# Allegro board METO_STM_CRY_V0_17.brd
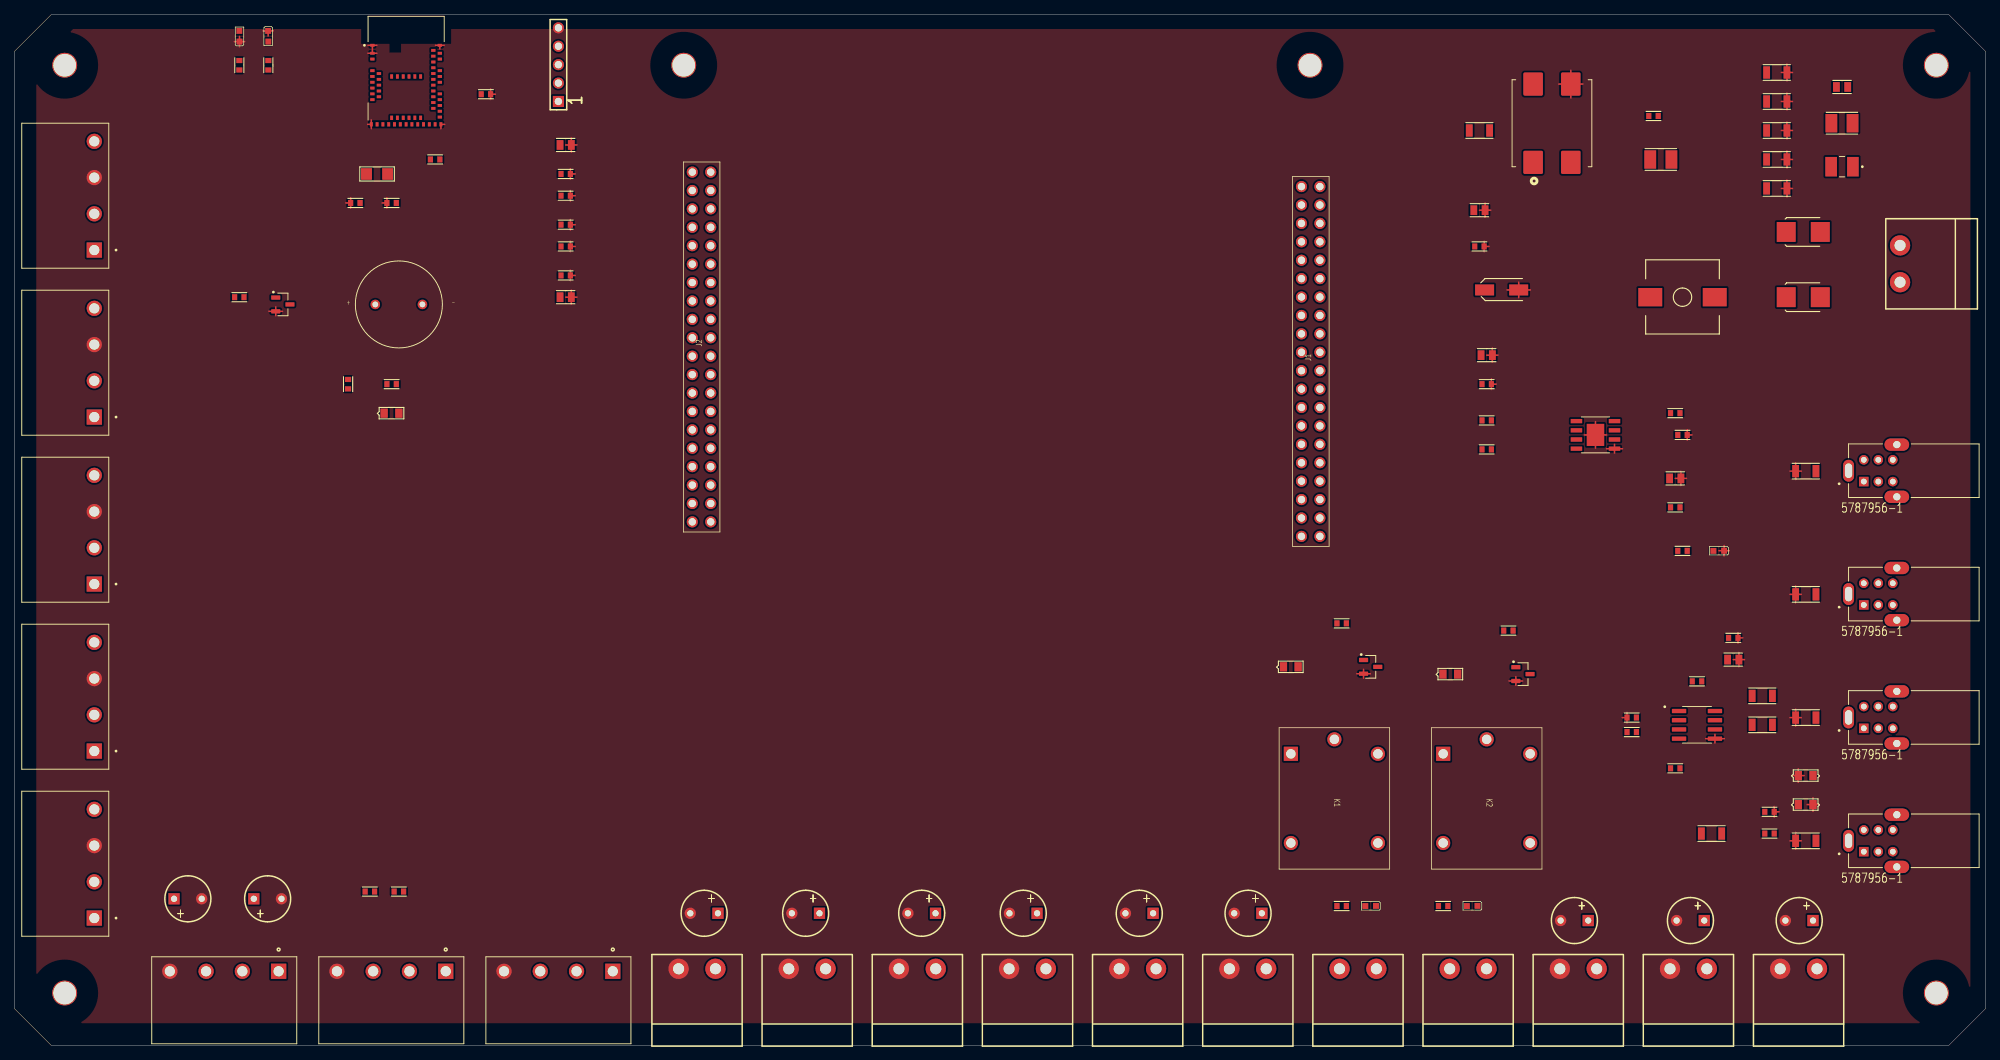
[diagram p0: board, top side]
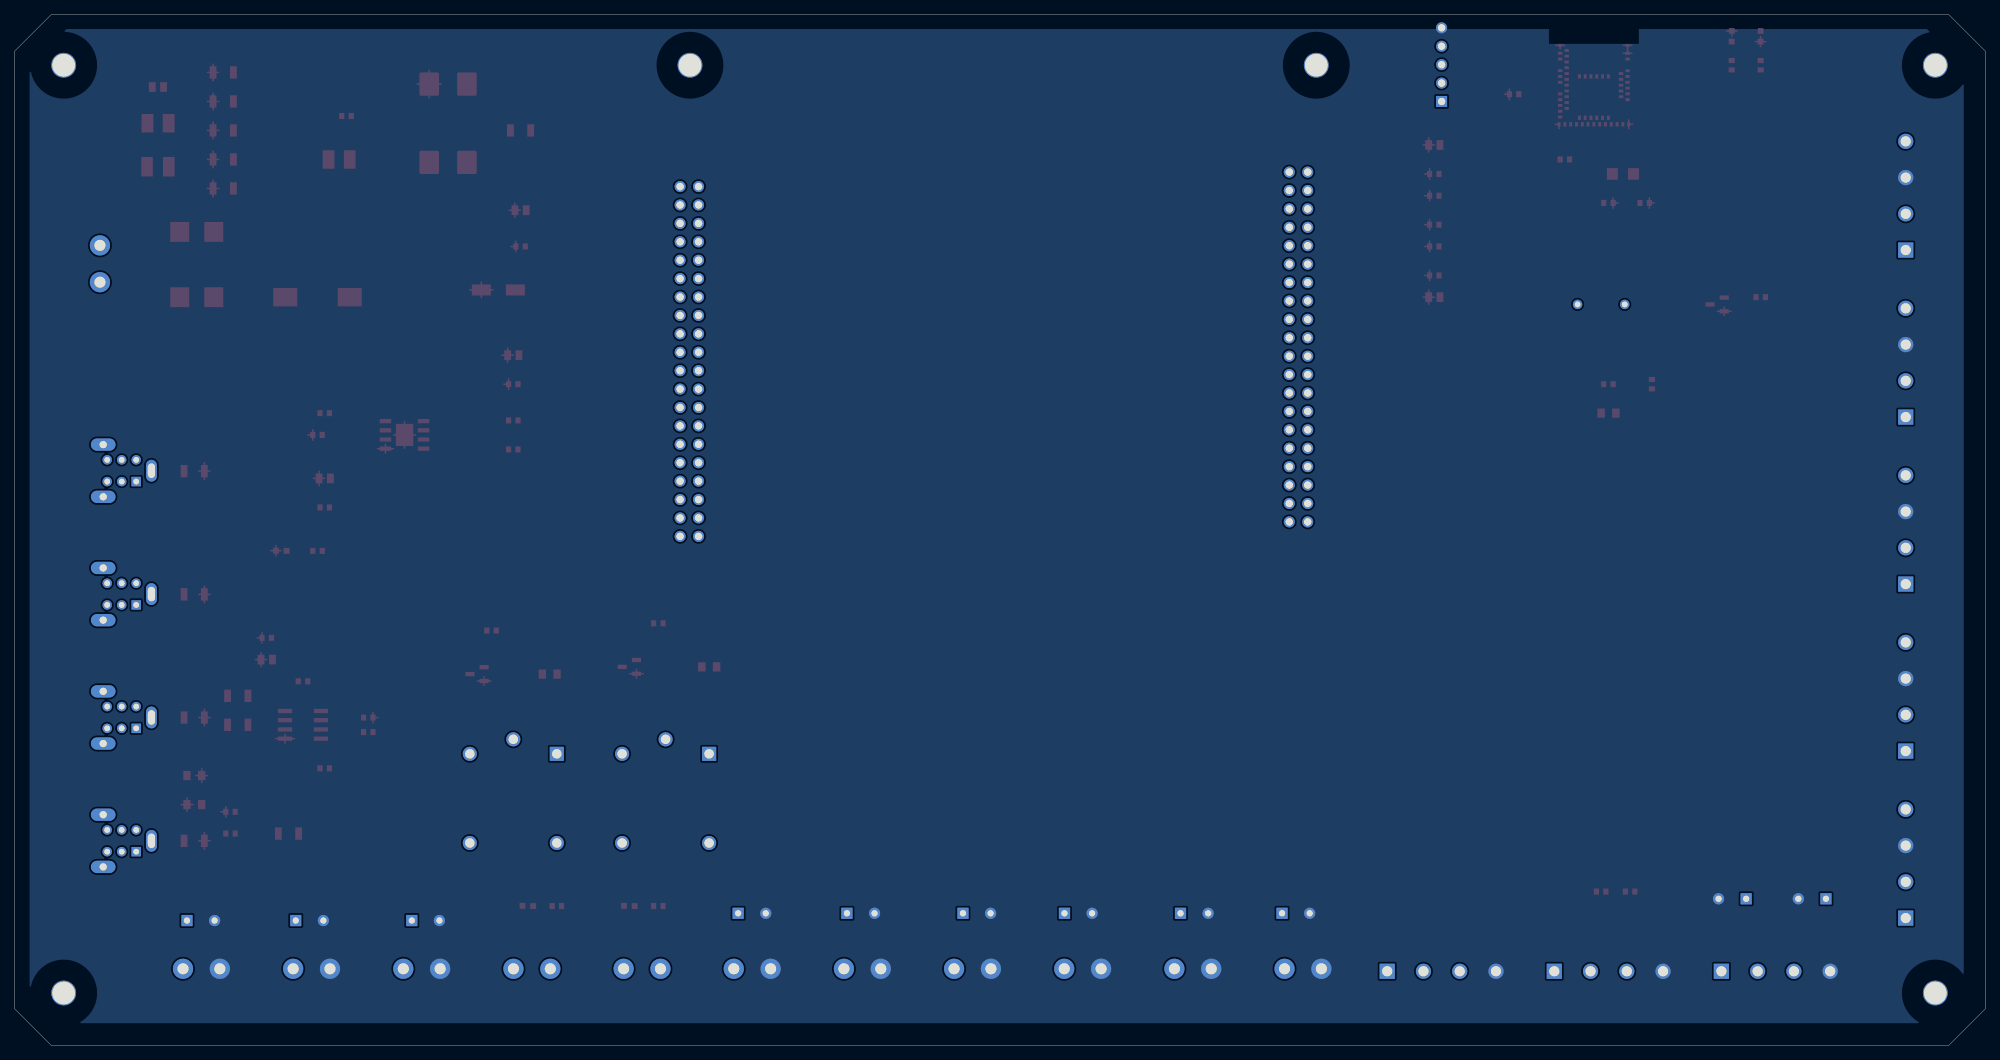
[diagram p1: board, bottom side, seen from below]

Outline 271.78 x 142.24 mm; copper layers: TOP, BOTTOM. Coordinates in mm from the lower left corner of the outline.
Outline path: 0,137.16 0,5.08 5.08,0 266.7,0 271.78,5.08 271.78,137.16 266.7,142.24 5.08,142.24 0,137.16

## Design rules (mm)
constraint set DEFAULT: min track width 0.203

## Placement (name value [footprint] x y rotation side)
C1  CAP POL  [CAPPOL2D250LS150034]  172 18.24 180 top
C2  CAP POL  [CAPPOL2D250LS150034]  217 17.24 180 top
C3  CAP POL  [CAPPOL2D250LS150034]  157 18.24 180 top
C4  CAP POL  [CAPPOL2D250LS150034]  141 18.24 180 top
C5  CAP POL  [CAPPOL2D250LS150034]  127 18.24 180 top
C6  CAP POL  [CAPPOL2D250LS150034]  111 18.24 180 top
C7  CAP POL  [CAPPOL2D250LS150034]  22 20.24 0 top
C8  CAP POL  [CAPPOL2D250LS150034]  97 18.24 180 top
C9  CAP POL  [CAPPOL2D250LS150034]  33 20.24 0 top
C10  CAP POL  [CAPPOL2D250LS150034]  233 17.24 180 top
C11  CAP POL  [CAPPOL2D250LS150034]  248 17.24 180 top
C12  10u/6V3/CER  [SMC0805]  237 53.24 0 top
C13  100n  [SMC0603]  237 56.24 0 top
C14  10u/6V3/CER  [SMC0805]  76 124.24 0 top
C15  100n  [SMC0603]  76 120.24 0 top
C16  100n  [SMC0603]  76 117.24 0 top
C17  100n  [SMC0603]  76 113.24 0 top
C18  100n  [SMC0603]  76 110.24 0 top
C19  100n  [SMC0603]  76 106.24 0 top
C20  10u/6V3/CER  [SMC0805]  76 103.24 0 top
C21  100n  [SMC0603]  65 131.24 0 top
C22  18p  [SMC0603]  47 116.24 0 top
C23  18p  [SMC0603]  52 116.24 0 top
C24  100n  [SMC0603]  202 110.24 0 top
C25  22uF/25V/LowESL  [SMC1210]  227 122.24 0 top
C26  100n  [SMC0603]  226 128.24 0 top
C27  10u/6V3/CER  [SMC0805]  202 115.24 0 top
C28  10u/6V3/CER  [SMC0805]  203 95.24 0 top
C29  100n  [SMC0603]  203 91.24 0 top
C30  10u/6V3/CER  [SMC0805]  229 78.24 0 top
C31  22uF/25VDV/Tantal  [CAP_6TPB33M]  252 121.24 180 top
C32  22uF/25V/LowESL  [SMC1210]  252 127.24 180 top
C33  10u/25V/CER  [SMC0805]  252 132.24 180 top
D1  1N4148WX  [SMDSOD323SD05T]  177 52.24 0 top
D2  1N4148WX  [SMDSOD323SD05T]  199 51.24 0 top
D3  SD12C  [SMDSOD323PESD5V]  248 33.24 0 top
D4  SD12C  [SMDSOD323PESD5V]  248 37.24 0 top
D5  1N4148WX  [SMDSOD323SD05T]  53 87.24 0 top
D6  LED-BLUE  [LED_0603]  35 139.24 90 top
D7  LED-RED  [LED_0603]  31 139.24 270 top
D8  MBRA340T3  [SMDO214AA21]  249 112.24 0 top
D9  MBRA340T3  [SMDO214AA21]  249 103.24 0 top
D10  SMAJ7A  [SMDO214AA21SMAJ33A]  205 104.24 0 top
D11  LED-GREEN  [LED_0603]  235 68.24 0 top
D12  LED-BLUE  [LED_0603]  187 19.24 0 top
D13  LED-BLUE  [LED_0603]  201 19.24 0 top
FB1  MPZ1608S601A  [SMR0603]  229 74.24 0 top
FL1  ACM1211-102-2PL-TL01  [FIL_ACM1211-102-2PL-TL01]  212 127.24 90 top
J1  FH_2x20SG  [FH2X20SG]  180 70.24 90 top
J2  FH_2x20SG  [FH2X20SG]  96 72.24 90 top
J3  CON2  [2LI_KLEMENS_200MILS]  155.46 10.58 180 top
J4  CON2  [2LI_KLEMENS_200MILS]  170.64 10.58 180 top
J5  282811-4  [TE_282811-4]  11 117.24 90 top
J6  CON2  [2LI_KLEMENS_200MILS]  185.83 10.58 180 top
J7  CON2  [2LI_KLEMENS_200MILS]  201.02 10.58 180 top
J8  282811-4  [TE_282811-4]  11 94.2 90 top
J9  CON2  [2LI_KLEMENS_200MILS]  140.27 10.58 180 top
J10  282811-4  [TE_282811-4]  11 71.16 90 top
J11  282811-4  [TE_282811-4]  51.96 10.24 180 top
J12  CON2  [2LI_KLEMENS_200MILS]  125.08 10.58 180 top
J13  282811-4  [TE_282811-4]  11 48.12 90 top
J14  282811-4  [TE_282811-4]  75 10.24 180 top
J15  CON2  [2LI_KLEMENS_200MILS]  109.89 10.58 180 top
J16  282811-4  [TE_282811-4]  11 25.08 90 top
J17  CON2  [2LI_KLEMENS_200MILS]  94.7 10.58 180 top
J18  CON2  [2LI_KLEMENS_200MILS]  79.51 10.58 180 top
J19  CON2  [2LI_KLEMENS_200MILS]  260 93.24 270 top
J20  282811-4  [TE_282811-4]  28.92 10.24 180 top
J21  CON2  [2LI_KLEMENS_200MILS]  216.21 10.58 180 top
J22  CON2  [2LI_KLEMENS_200MILS]  231.4 10.58 180 top
J23  5787956-1  [TE_5787956-1]  257 79.3 0 top
J24  CON5  [CON5X140PROG]  75 130.24 90 top
J25  5787956-1  [TE_5787956-1]  257 62.28 0 top
J26  5787956-1  [TE_5787956-1]  257 45.26 0 top
J27  5787956-1  [TE_5787956-1]  257 28.24 0 top
K1  JQC-3F-_T73_-1Z-12VDC  [JQC3FT731Z12VDC]  176 40.24 270 top
K2  JQC-3F-_T73_-1Z-12VDC  [JQC3FT731Z12VDC]  197 40.24 270 top
L1  10uH  [SML0603]  58 122.24 0 top
L2  10u/SLF10145  [SLF10145NEW]  230 103.24 0 top
LS1  CCG-1206  [CUI_CCG-1206]  53 102.24 0 top
NOREF  -  [unnamed]  92.28 135.24 0 top
NOREF#2  -  [#2]  197 40.24 0 top
NOREF#3  -  [#2]  176 40.24 90 top
NOREF#4  -  [#2]  197 27.94 0 top
NOREF#5  -  [#2]  197 40.24 90 top
NOREF#6  -  [unnamed]  265 7.24 0 top
NOREF#7  -  [unnamed]  178.64 135.24 0 top
NOREF#8  -  [#2]  209 27.94 90 top
NOREF#9  -  [unnamed]  265 135.24 0 top
NOREF#10  -  [#2]  188 27.94 90 top
NOREF#11  -  [unnamed]  6.92 7.24 0 top
NOREF#12  -  [#2]  188 40.24 90 top
NOREF#13  -  [#2]  176 27.94 0 top
NOREF#14  -  [unnamed]  6.92 135.24 0 top
NOREF#15  -  [#2]  176 40.24 0 top
NOREF#16  -  [#2]  209 40.24 90 top
Q1  BC817  [SOT95P230X110-3N]  187 52.24 0 top
Q2  BC817  [SOT95P230X110-3N]  208 51.24 0 top
Q3  BC817  [SOT95P230X110-3N]  37 102.24 0 top
R1  1K  [SMR0603]  183 58.24 0 top
R2  1K  [SMR0603]  206 57.24 0 top
R3  10k  [SMR0603]  242 29.24 0 top
R4  10k  [SMR0603]  229 38.24 0 top
R5  10k  [SMR0603]  223 43.24 0 top
R6  10k  [SMR0603]  232 50.24 180 top
R7  10k  [SMR0603]  223 45.24 0 top
R8  100R  [SMR1206]  241 44.24 180 top
R9  120R  [SMR1206]  234 29.24 0 top
R10  100R  [SMR1206]  241 48.24 180 top
R11  100R  [SMR1206]  247 79.24 0 top
R12  10k  [SMR0603]  242 32.24 0 top
R13  33R  [SMR0603]  46 91.24 270 top
R14  1K  [SMR0603]  52 91.24 180 top
R15  180R  [SMR0603]  31 103.24 0 top
R16  470R  [SMR0603]  35 135.24 90 top
R17  470R  [SMR0603]  31 135.24 90 top
R18  OR  [SMR1206]  202 126.24 0 top
R19  0R  [SMR1206]  243 134.24 0 top
R20  0R  [SMR1206]  243 130.24 0 top
R21  0R  [SMR1206]  243 126.24 0 top
R22  0R  [SMR1206]  243 122.24 0 top
R23  0R  [SMR1206]  243 118.24 0 top
R24  100k  [SMR0603]  203 86.24 0 top
R25  6k8  [SMR0603]  229 87.24 0 top
R26  100k  [SMR0603]  203 82.24 0 top
R27  470R  [SMR0603]  230 68.24 0 top
R28  2k2  [SMR0603]  230 84.24 0 top
R29  100R  [SMR1206]  247 62.24 0 top
R30  100R  [SMR1206]  247 45.24 0 top
R31  100R  [SMR1206]  247 28.24 0 top
R32  470R  [SMR0603]  183 19.24 0 top
R33  470R  [SMR0603]  197 19.24 0 top
R34  1K5  [SMR0603]  49 21.24 0 top
R35  1K5  [SMR0603]  53 21.24 0 top
U1  MAX485ESA+  [SOIC127P600X175-8N]  232 44.24 0 top
U2  MDBT50Q-1MV2  [XCVR_MDBT50Q-1MV2]  54 134.24 0 top
U3  AP7165-SPG-13  [SOIC127P600X163-9N]  218 84.24 0 top
Y1  CM315D32768DZFT  [XTAL_CM315_SMD]  50 120.24 180 top

## Library data of the parts
C1-C11 = CAP POL
C12-C23 C28-C30 = CAPACITOR NON-POL
C24-C27 = CAPACITOR NON-POL: room: Vdd5V
C31 = 6TPB33M: room: PowerIn
C32 C33 = CAPACITOR NON-POL: room: PowerIn
D1 D2 D5 = DIODE ZENER: room: Buzzer
D3 D4 = DIODE TVS BI-DIR: room: rs232
D6 D7 D11-D13 = LED
D8 = 1N5819M/CYL
D9 = 1N5819M/CYL: room: Vdd5V
D10 = DIODE TVS: room: Vdd5V
FB1 = INDUCTOR/SM
FL1 = ACM1211-102-2PL-TL01: room: Vdd5V
J1 J2 = FH_2x20SG
J3 J4 J6 J7 J9 J12 J15 J17-J19 J21 J22 = CON2
J5 J8 J10 J11 J13 J14 J16 J20 = 282811-4
J23 J25-J27 = 5787956-1
J24 = CON5
K1 K2 = JQC-3F-_T73_2
L1 = INDUCTOR
L2 = INDUCTOR/SM: room: Vdd5V
LS1 = CCG-1206: room: Buzzer
Q1-Q3 = BC817: room: Buzzer
R1 R2 R11 R13-R15 R29-R31 = RESISTOR/SM_0: room: Buzzer
R3-R10 R12 R25 R28 = RESISTOR/SM_0
R16 R17 R24 R26 R27 R32-R35 = RESISTOR
R18 = RESISTOR/SM_0: room: Vdd5V
R19-R23 = RESISTOR: room: GndMatch
U1 = MAX485ESA+
U2 = MDBT50Q-1MV2_0
U3 = AP7165-SPG-13_0
Y1 = CRYSTAL/SM

## Footprints (pads in the part's own frame, mm; a bottom-side part is the same pattern mirrored in y, then rotated)
2LI_KLEMENS_200MILS
  round 2.794 hole 1.524: 1(-17.145,0) 2(-12.065,0)
CAP_6TPB33M
  rect 1.6x2.7 smd: 1(-1.5,0) 2(1.5,0)
CAPPOL2D250LS150034
  rect 1.549x1.549 hole 0.864: 1(0,0)
  round 1.549 hole 0.864: 2(3.81,0)
CON5X140PROG
  rect 1.524x1.524 hole 1.016: 1(0,0)
  round 1.524 hole 1.016: 2(2.54,0) 3(5.08,0) 4(7.62,0) 5(10.16,0)
CUI_CCG-1206
  round 1.308 hole 0.8: M(3.25,0) P(-3.25,0)
FH2X20SG
  round 1.53 hole 1.02: 1(0,0) 2(0,2.54) 3(2.54,0) 4(2.54,2.54) 5(5.08,0) 6(5.08,2.54) 7(7.62,0) 8(7.62,2.54) 9(10.16,0) 10(10.16,2.54) 11(12.7,0) 12(12.7,2.54) 13(15.24,0) 14(15.24,2.54) 15(17.78,0) 16(17.78,2.54) 17(20.32,0) 18(20.32,2.54) 19(22.86,0) 20(22.86,2.54) 21(25.4,0) 22(25.4,2.54) 23(27.94,0) 24(27.94,2.54) 25(30.48,0) 26(30.48,2.54) 27(33.02,0) 28(33.02,2.54) 29(35.56,0) 30(35.56,2.54) 31(38.1,0) 32(38.1,2.54) 33(40.64,0) 34(40.64,2.54) 35(43.18,0) 36(43.18,2.54) 37(45.72,0) 38(45.72,2.54) 39(48.26,0) 40(48.26,2.54)
FIL_ACM1211-102-2PL-TL01
  custom 3.2x2.7 smd: 1(-5.4,2.6) 2(-5.4,-2.6) 3(5.4,-2.6) 4(5.4,2.6)
JQC3FT731Z12VDC
  rect 1.95x1.95 hole 1.3: 1(0,0)
  round 1.95 hole 1.3: 2(12.3,0) 3(12.3,12) 4(0,12) 5(-2,6)
LED_0603
  rect 0.813x0.813 smd: 1(-0.737,0) 2(0.737,0.025)
SLF10145NEW
  rect 3.302x2.54 smd: 1(-4.445,0) 2(4.445,0)
SMC0603
  rect 0.711x0.838 smd: 1(-0.65,0) 2(0.65,0)
SMC0805
  rect 0.94x1.346 smd: 1(-0.78,0) 2(0.78,0)
SMC1210
  rect 1.626x2.54 smd: 1(-1.448,0) 2(1.473,0)
SMDO214AA21
  rect 2.616x2.743 smd: 1(0,0) 2(-4.699,0)
SMDO214AA21SMAJ33A
  rect 2.616x1.524 smd: 1(2.413,0) 2(-2.286,0)
SMDSOD323PESD5V
  rect 1.016x1.27 smd: 1(0,0) 2(-2.032,0)
SMDSOD323SD05T
  rect 1.016x1.27 smd: 1(0,0) 2(-2.032,0)
SML0603
  rect 0.711x0.838 smd: 1(-0.65,0) 2(0.65,0)
SMR0603
  rect 0.711x0.838 smd: 1(-0.65,0) 2(0.65,0)
SMR1206
  rect 0.94x1.702 smd: 1(-1.4,0) 2(1.4,0)
SOIC127P600X163-9N
  rect 1.58x0.59 smd: 1(-2.625,1.905) 2(-2.625,0.635) 3(-2.625,-0.635) 4(-2.625,-1.905) 5(2.625,-1.905) 6(2.625,-0.635) 7(2.625,0.635) 8(2.625,1.905)
  rect 2.41x3.05 smd: 9(0,0)
SOIC127P600X175-8N
  custom 1.97x0.59 smd: 1(-2.475,1.905) 2(-2.475,0.635) 3(-2.475,-0.635) 4(-2.475,-1.905) 5(2.475,-1.905) 6(2.475,-0.635) 7(2.475,0.635) 8(2.475,1.905)
SOT95P230X110-3N
  custom 1.26x0.59 smd: 1(-0.98,0.95) 2(-0.98,-0.95) 3(0.98,0)
TE_282811-4
  rect 2.1x2.1 hole 1.4: 1(-7.5,0)
  round 2.1 hole 1.4: 2(-2.5,0) 3(2.5,0) 4(7.5,0)
TE_5787956-1
  rect 1.308x1.308 hole 0.8: 1(-2,-1.5)
  round 1.308 hole 0.8: 2(-2,1.5) 3(0,-1.5) 4(0,1.5) 5(2,-1.5) 6(2,1.5)
  oval 1.508x3.016 hole 1x2: S1(-4.1,0)
  oval 3.4x1.7 hole 1: S2(2.55,3.6) S3(2.55,-3.6)
unnamed
  round 3.429 hole 3.124: (0,0)
XCVR_MDBT50Q-1MV2
  rect 0.6x0.4 smd: 1(-4.65,3.75) 2(-4.65,2.65) 3(-4.65,1.85) 4(-4.65,0.25) 5(-3.75,-0.15) 6(-4.65,-0.55) 7(-3.75,-0.95) 8(-4.65,-1.35) 9(-3.75,-1.75) 10(-4.65,-2.15) 11(-3.75,-2.55) 12(-4.65,-2.95) 13(-3.75,-3.35) 14(-4.65,-3.75) 34(4.65,-6.15) 35(4.65,-5.35) 36(3.75,-4.95) 37(4.65,-4.55) 38(3.75,-4.15) 39(4.65,-3.75) 40(3.75,-3.35) 41(4.65,-2.95) 42(3.75,-2.55) 43(3.75,-1.75) 44(4.65,-1.35) 45(3.75,-0.95) 46(4.65,-0.55) 47(3.75,-0.15) 48(4.65,0.25) 49(3.75,0.65) 50(3.75,1.45) 51(4.65,1.85) 52(3.75,2.25) 53(4.65,2.65) 54(3.75,3.05) 55(4.65,3.75)
  rect 0.4x0.6 smd: 15(-4.8,-7.15) 16(-4,-7.15) 17(-3.2,-7.15) 18(-2.4,-7.15) 19(-2,-6.25) 20(-1.6,-7.15) 21(-1.2,-6.25) 22(-0.8,-7.15) 23(-0.4,-6.25) 24(0,-7.15) 25(0.4,-6.25) 26(0.8,-7.15) 27(1.2,-6.25) 28(1.6,-7.15) 29(2,-6.25) 30(2.4,-7.15) 31(3.2,-7.15) 32(4,-7.15) 33(4.8,-7.15) 56(-2,-0.55) 57(-1.2,-0.55) 58(-0.4,-0.55) 59(0.4,-0.55) 60(1.2,-0.55) 61(2,-0.55)
XTAL_CM315_SMD
  rect 1.499x1.6 smd: 1(-1.453,0) 2(1.463,0)

## Nets
3.3V: C14.1 C15.1 C16.1 C17.1 C18.1 C19.1 C20.1 FB1.2 J11.1 J24.1 L1.2 R27.1 R34.1 R35.1 U2.28 U2.30(VDDH) U2.32
GND: C1.2 C2.2 C3.2 C4.2 C5.2 C6.2 C7.2 C8.2 C9.2 C10.2 C11.2 C12.2 C13.2 C14.2 C15.2 C16.2 C17.2 C18.2 C19.2 C20.2 C21.2 C22.1 C23.1 C24.2 C27.2 C28.2 C29.2 C30.2 D3.1 D4.2 D6.2(CATHODE) D7.2(CATHODE) D10.1 D11.2(CATHODE) FL1.3 J3.2 J5.3 J7.2 J8.3 J9.2 J10.3 J11.4 J12.2 J13.3 J14.4 J15.2 J16.3 J17.2 J18.2 J20.4 J21.2 J22.2 J24.5 Q1.2(E) Q2.2(E) Q3.2(E) R7.1 R11.1 R12.2 R19.2 R20.2 R21.2 R22.2 R23.2 R28.2 R29.1 R30.1 R31.1 U1.5 U2.1 U2.2 U2.15 U2.33 U2.55 U3.5 U3.9
VDD5VIN: C12.1 C13.1 C24.1 C27.1 C28.1 C29.1 D1.2(CATHODE) D2.2(CATHODE) D10.2(CATHODE) FL1.4 J14.1 J20.3 K1.1 K2.1 R3.1 R4.1 R5.1 R6.1 R13.2 R18.2 R24.1 R26.1 R32.1 R33.1 U1.8(VCC) U3.1 U3.2
485_A: D3.2 J23.5 J25.5 J26.5 J27.5 R3.2 R8.1 R9.1
485_B: D4.1 J23.6 J25.6 J26.6 J27.6 R9.2 R10.1 R12.1
BL_EX_PIN_1: U2.52
BL_EX_PIN_2: U2.54
BL_EX_PIN_3: U2.11
BL_EX_PIN_4: U2.19
BL_EX_PIN_5: U2.16
BL_EX_PIN_6: U2.13
BUZZER: R15.1 U2.22
CON_A_PIN_1: J1.1
CON_A_PIN_2: J1.2
CON_A_PIN_3: J1.3
CON_A_PIN_4: C11.1 J1.4 J22.1
CON_A_PIN_5: J1.5
CON_A_PIN_6: J1.6
CON_A_PIN_7: J1.7
CON_A_PIN_9: J1.9
CON_A_PIN_10: J1.10
CON_A_PIN_11: J1.11
CON_A_PIN_12: J1.12
CON_A_PIN_13: J1.13
CON_A_PIN_14: J1.14
CON_A_PIN_15: J1.15 J1.25
CON_A_PIN_16: J1.16
CON_A_PIN_17: J1.17 J1.27
CON_A_PIN_18: J1.18
CON_A_PIN_19: J1.8 J1.19 J1.20 J1.22 J2.9 J2.20 J2.32
CON_A_PIN_21: J1.21
CON_A_PIN_23: J1.23
CON_A_PIN_24: J1.24
CON_A_PIN_26: J1.26
CON_A_PIN_28: C6.1 J1.28 J17.1
CON_A_PIN_29: J1.29
CON_A_PIN_30: J1.30
CON_A_PIN_31: J1.31
CON_A_PIN_32: C10.1 J1.32 J21.1
CON_A_PIN_33: J1.33
CON_A_PIN_34: J1.34 J13.1
CON_A_PIN_35: J1.35
CON_A_PIN_36: J1.36 J16.1
CON_A_PIN_37: J1.37
CON_A_PIN_38: J1.38 R1.1
CON_A_PIN_39: J1.39
CON_A_PIN_40: J1.40
CON_B_PIN_1: C5.1 J2.1 J15.1
CON_B_PIN_2: C2.1 J2.2 J7.1
CON_B_PIN_3: J2.3 J11.2 R35.2 U2.37
CON_B_PIN_4: J2.4
CON_B_PIN_5: J2.5 J11.3 R34.2 U2.36
CON_B_PIN_6: J2.6 J14.2 R6.2 U1.1
CON_B_PIN_7: J2.7
CON_B_PIN_8: J2.8
CON_B_PIN_10: J2.10
CON_B_PIN_11: C4.1 J2.11 J12.1
CON_B_PIN_12: J2.12
CON_B_PIN_13: J2.13
CON_B_PIN_14: J2.14 R2.1
CON_B_PIN_15: J2.15
CON_B_PIN_16: J2.16
CON_B_PIN_17: C3.1 J2.17 J9.1
CON_B_PIN_18: C8.1 J2.18 J18.1
CON_B_PIN_19: C1.1 J2.19 J3.1
CON_B_PIN_21: J2.21 J5.4 J8.4 J10.4 J13.4 J16.4
CON_B_PIN_22: J2.22 J16.2
CON_B_PIN_23: J2.23 J10.2
CON_B_PIN_24: J2.24 J13.2
CON_B_PIN_25: J2.25 J8.2
CON_B_PIN_26: J2.26
CON_B_PIN_27: J2.27 J5.2
CON_B_PIN_28: J2.28
CON_B_PIN_29: J2.29 J10.1
CON_B_PIN_30: J2.30
CON_B_PIN_31: J2.31 J8.1
CON_B_PIN_33: J2.33 J5.1
CON_B_PIN_34: J2.34 J14.3 R4.2 U1.4
CON_B_PIN_35: J2.35
CON_B_PIN_36: J2.36
CON_B_PIN_37: J2.37
CON_B_PIN_38: J2.38
CON_B_PIN_39: J2.39
CON_B_PIN_40: J2.40
DBG_LED_1: R16.1 U2.42
DBG_LED_2: R17.1 U2.44
ENCODER_A: C7.1 J20.1 U2.60
ENCODER_B: C9.1 J20.2 U2.56
FGND: C25.2 C26.2 C31.2 C32.2 C33.2 D9.1 FL1.2 J19.2 R19.1 R20.1 R21.1 R22.1 R23.1
NRESET: C21.1 U2.40
RELAY1_1: J4.1 K1.5
RELAY1_2: J4.2 K1.2
RELAY2_1: J6.1 K2.5
RELAY2_2: J6.2 K2.2
SWCLK: J24.2 U2.53
SWDIO: J24.3 U2.51
UC_OSC_IN: C22.2 U2.17 Y1.2
UC_OSC_OUT: C23.2 U2.18 Y1.1
VDC_5V: C31.1 C32.1 C33.1 D8.1 J19.1
N8883662: D5.1 LS1.M Q3.3 R14.1
N8883700: D5.2(CATHODE) LS1.P R13.1 R14.2
N9062725: L1.1 U2.31
N9076286: D8.2(CATHODE) D9.2(CATHODE) L2.2
N9076290: C25.1 C26.1 FL1.1 L2.1 R18.1
N9079599: C30.1 FB1.1 R25.1 U3.7 U3.8
N9079749: R24.2 U3.3(POK)
N9079753: R25.2 R28.1 U3.6
N9079813: R26.2 U3.4
N9092651: D1.1 D12.2(CATHODE) K1.4 Q1.3
N9092718: Q1.1 R1.2
N9093131: D2.1 D13.2(CATHODE) K2.4 Q2.3
N9093215: Q2.1 R2.2
N9096482: R7.2 U1.2
N9096486: R5.2 U1.3
N9096991: R8.2 U1.6
N9096995: R10.2 U1.7
N9098499: J23.S1 J23.S2 J23.S3(SHIELD__2) R11.2
N9104799: J25.S1 J25.S2 J25.S3(SHIELD__2) R29.2
N9105165: J26.S1 J26.S2 J26.S3(SHIELD__2) R30.2
N9105269: J27.S1 J27.S2 J27.S3(SHIELD__2) R31.2
N9107937: D12.1 R32.2
N9108044: D13.1 R33.2
N90510690: Q3.1 R15.2
N90714391: D6.1 R16.2
N90750741: D7.1 R17.2
N90797911: D11.1 R27.2

Pads without a net: J23 1 2 3 4; J24 4; J25 1 2 3 4; J26 1 2 3 4; J27 1 2 3 4; K1 3; K2 3; U2 3 4 5 6 7 8 9 10 12 14 20 21 23 24 25 26 27 29 34 35 38 39 41 43 45 46 47 48 49 50 57 58 59 61

## Routing (per net, layer and track width the routed paths; a pad name or vN(x,y) marks a point on that pad's centre or on a via; arc(x,y) is an arc through that point)
GND: length 143.6
  TOP w0.203: U2.2 49.95,136.89 ; U2.2 49.35,137.39 ; U2.2 48.75,136.89 ; 76.65,105.52 C19.2 ; C19.2 77.31,106.24 ; C19.2 76.65,106.96 ; D7.2 31.03,139.21 ; D7.2 31.74,138.5 ; D7.2 30.31,138.5 ; D7.2 31.03,137.79 ; 244.82,28.24 R31.1 ; R31.1 245.6,29.4 ; R31.1 245.6,27.08 ; R31.1 246.37,28.24 ; C30.2 230.55,78.24 ; C30.2 229.78,77.26 ; C30.2 229,78.24 ; C30.2 229.78,79.22 ; R20.2 245.17,130.24 ; R20.2 244.4,129.08 ; R20.2 244.4,131.4 ; R20.2 243.62,130.24 ; U2.1 49.95,137.99 ; U2.1 48.75,137.99 ; U2.1 49.35,137.49 ; C16.2 77.31,117.24 ; C16.2 76.65,117.96 ; C16.2 76.65,116.52 ; 216.49,84.24 U3.9 ; U3.9 219.51,84.24 ; U3.9 218,86.07 ; U3.9 218,82.41 ; 76.78,123.26 C14.2 ; C14.2 77.55,124.24 ; C14.2 76.01,124.24 ; C14.2 76.78,125.22 ; Q3.2 36.95,101.29 ; Q3.2 36.02,101.89 ; Q3.2 35.09,101.29 ; Q3.2 36.02,100.69 ; C12.2 237.78,54.22 ; C12.2 237,53.24 ; C12.2 237.78,52.26 ; C12.2 238.55,53.24 ; 219.53,82.34 U3.5 ; U3.5 220.62,81.74 ; U3.5 220.62,82.93 ; U3.5 221.72,82.34 ; 242.65,31.52 R12.2 ; R12.2 242.65,32.96 ; R12.2 243.31,32.24 ; 233.18,42.34 U1.5 ; U1.5 234.47,42.94 ; U1.5 235.76,42.34 ; U1.5 234.47,41.74 ; R23.2 245.17,118.24 ; R23.2 244.4,119.4 ; R23.2 244.4,117.08 ; R23.2 243.62,118.24 ; 244.82,45.24 R30.1 ; R30.1 246.37,45.24 ; R30.1 245.6,46.4 ; R30.1 245.6,44.08 ; R22.2 244.4,123.4 ; R22.2 243.62,122.24 ; R22.2 245.17,122.24 ; R22.2 244.4,121.08 ; 76.65,119.52 C15.2 ; C15.2 77.31,120.24 ; C15.2 76.65,120.96 ; C17.2 77.31,113.24 ; C17.2 76.65,112.52 ; C17.2 76.65,113.96 ; 203.65,90.52 C29.2 ; C29.2 204.31,91.24 ; C29.2 203.65,91.96 ; C18.2 76.65,110.96 ; C18.2 77.31,110.24 ; C18.2 76.65,109.52 ; 202.65,109.52 C24.2 ; C24.2 203.31,110.24 ; C24.2 202.65,110.96 ; D3.1 248,34.18 ; D3.1 248.81,33.24 ; D3.1 247.19,33.24 ; D3.1 248,32.3 ; 185.08,51.29 Q1.2 ; Q1.2 186.95,51.29 ; Q1.2 186.02,50.69 ; Q1.2 186.02,51.89 ; 206.08,50.29 Q2.2 ; Q2.2 207.02,49.69 ; Q2.2 207.95,50.29 ; Q2.2 207.02,50.89 ; 222.35,44.52 R7.1 ; R7.1 222.35,45.96 ; R7.1 221.69,45.24 ; FL1.3 216.25,132.64 ; FL1.3 214.6,134.54 ; FL1.3 214.6,130.74 ; FL1.3 212.94,132.64 ; D4.2 246.78,37.24 ; D4.2 245.15,37.24 ; D4.2 245.97,36.3 ; D4.2 245.97,38.18 ; 203,95.24 C28.2 ; C28.2 203.78,94.26 ; C28.2 204.55,95.24 ; C28.2 203.78,96.22 ; 243.62,134.24 R19.2 ; R19.2 245.17,134.24 ; R19.2 244.4,133.08 ; R19.2 244.4,135.4 ; 235.02,68.27 D11.2 ; D11.2 235.74,67.55 ; D11.2 235.74,68.98 ; D11.2 236.45,68.27 ; 76.78,102.26 C20.2 ; C20.2 77.55,103.24 ; C20.2 76.01,103.24 ; C20.2 76.78,104.22 ; R29.1 246.37,62.24 ; R29.1 245.6,61.08 ; R29.1 245.6,63.4 ; R29.1 244.82,62.24 ; 58.8,126.49 U2.33 59.3,127.09 ; 244.4,125.08 R21.2 ; R21.2 244.4,127.4 ; R21.2 245.17,126.24 ; R21.2 243.62,126.24 ; 51.35,115.52 C23.1 ; C23.1 50.69,116.24 ; C23.1 51.35,116.96 ; R11.1 245.6,80.4 ; R11.1 246.37,79.24 ; R11.1 245.6,78.08 ; R11.1 244.82,79.24 ; D10.1 209.03,104.24 ; D10.1 207.41,105.31 ; D10.1 207.41,103.17 ; D10.1 205.8,104.24 ; 34.97,139.27 D6.2 ; D6.2 35.69,139.98 ; D6.2 34.26,139.98 ; 237.65,55.52 C13.2 ; C13.2 238.31,56.24 ; C13.2 237.65,56.96 ; C27.2 202.78,116.22 ; C27.2 203.55,115.24 ; C27.2 202.78,114.26 ; C27.2 202,115.24 ; U2.15 49.2,127.69 ; U2.15 48.7,127.09 ; U2.15 49.2,126.49 ; C21.2 65.65,131.96 ; C21.2 66.31,131.24 ; C21.2 65.65,130.52 ; 45.69,116.24 C22.1 ; C22.1 46.35,116.96 ; C22.1 46.35,115.52 ; U2.55 59.25,137.99 ; U2.55 58.05,137.99 ; U2.55 58.65,137.49 ; R28.2 230.65,84.96 ; R28.2 231.31,84.24 ; R28.2 230.65,83.52

## Copper pours and planes (outline as drawn; the poured copper is in the pictures)
GND on TOP, BOTTOM: 8.08,3.08 264.62,3.08 269.7,8.16 269.7,135.16 264.62,140.24 8.08,140.24 3,135.16 3,8.16
